# Altium PCB RarePanel.PcbDoc
Units mm, origin at the board's own origin, x right, y up, seen from the top; angles counter-clockwise.
Board outline 35 x 35.01 mm, 2 copper layers (Top Layer, Bottom Layer); 42 components, 34 nets, 133 pads, 55 vias.
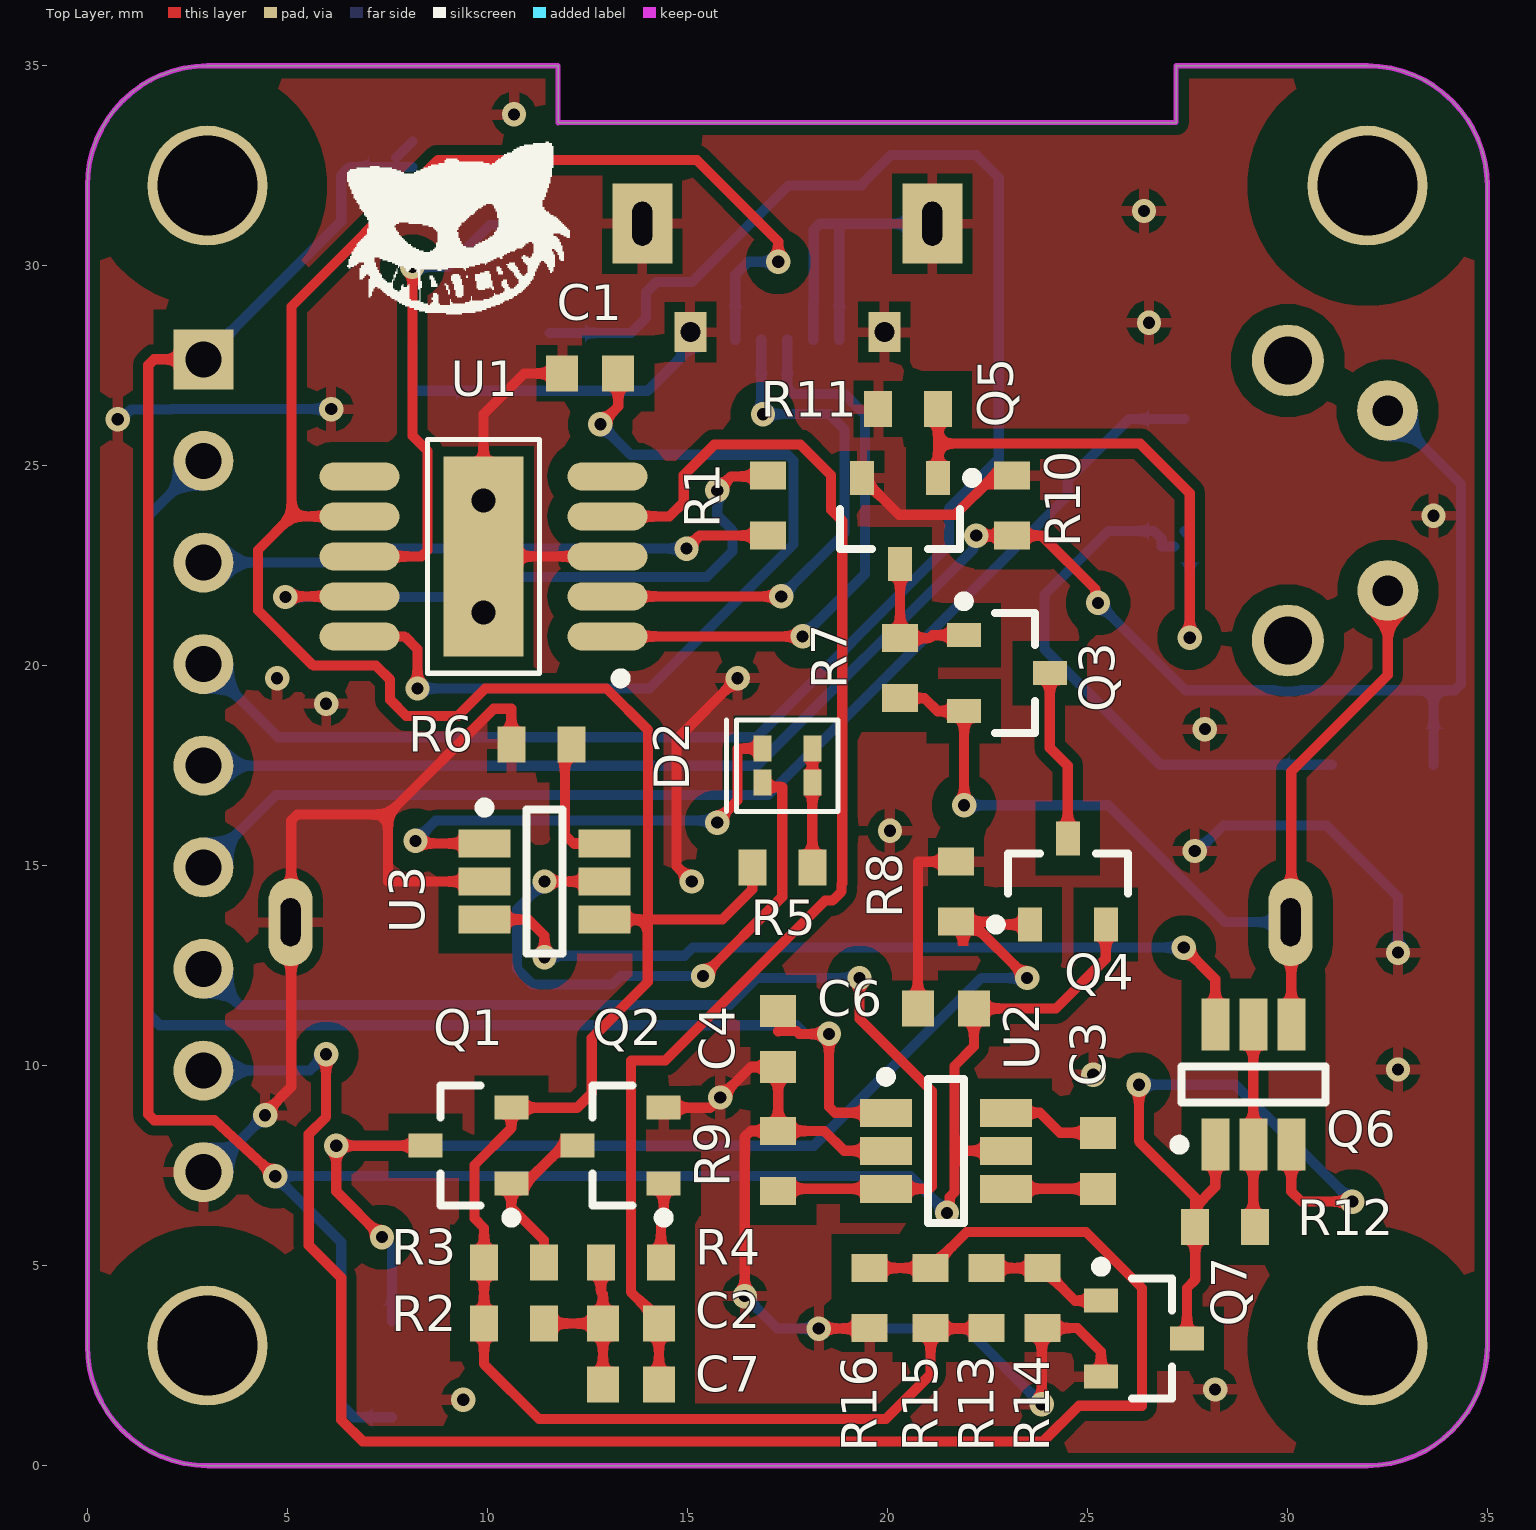
[diagram p0: Top Layer view]
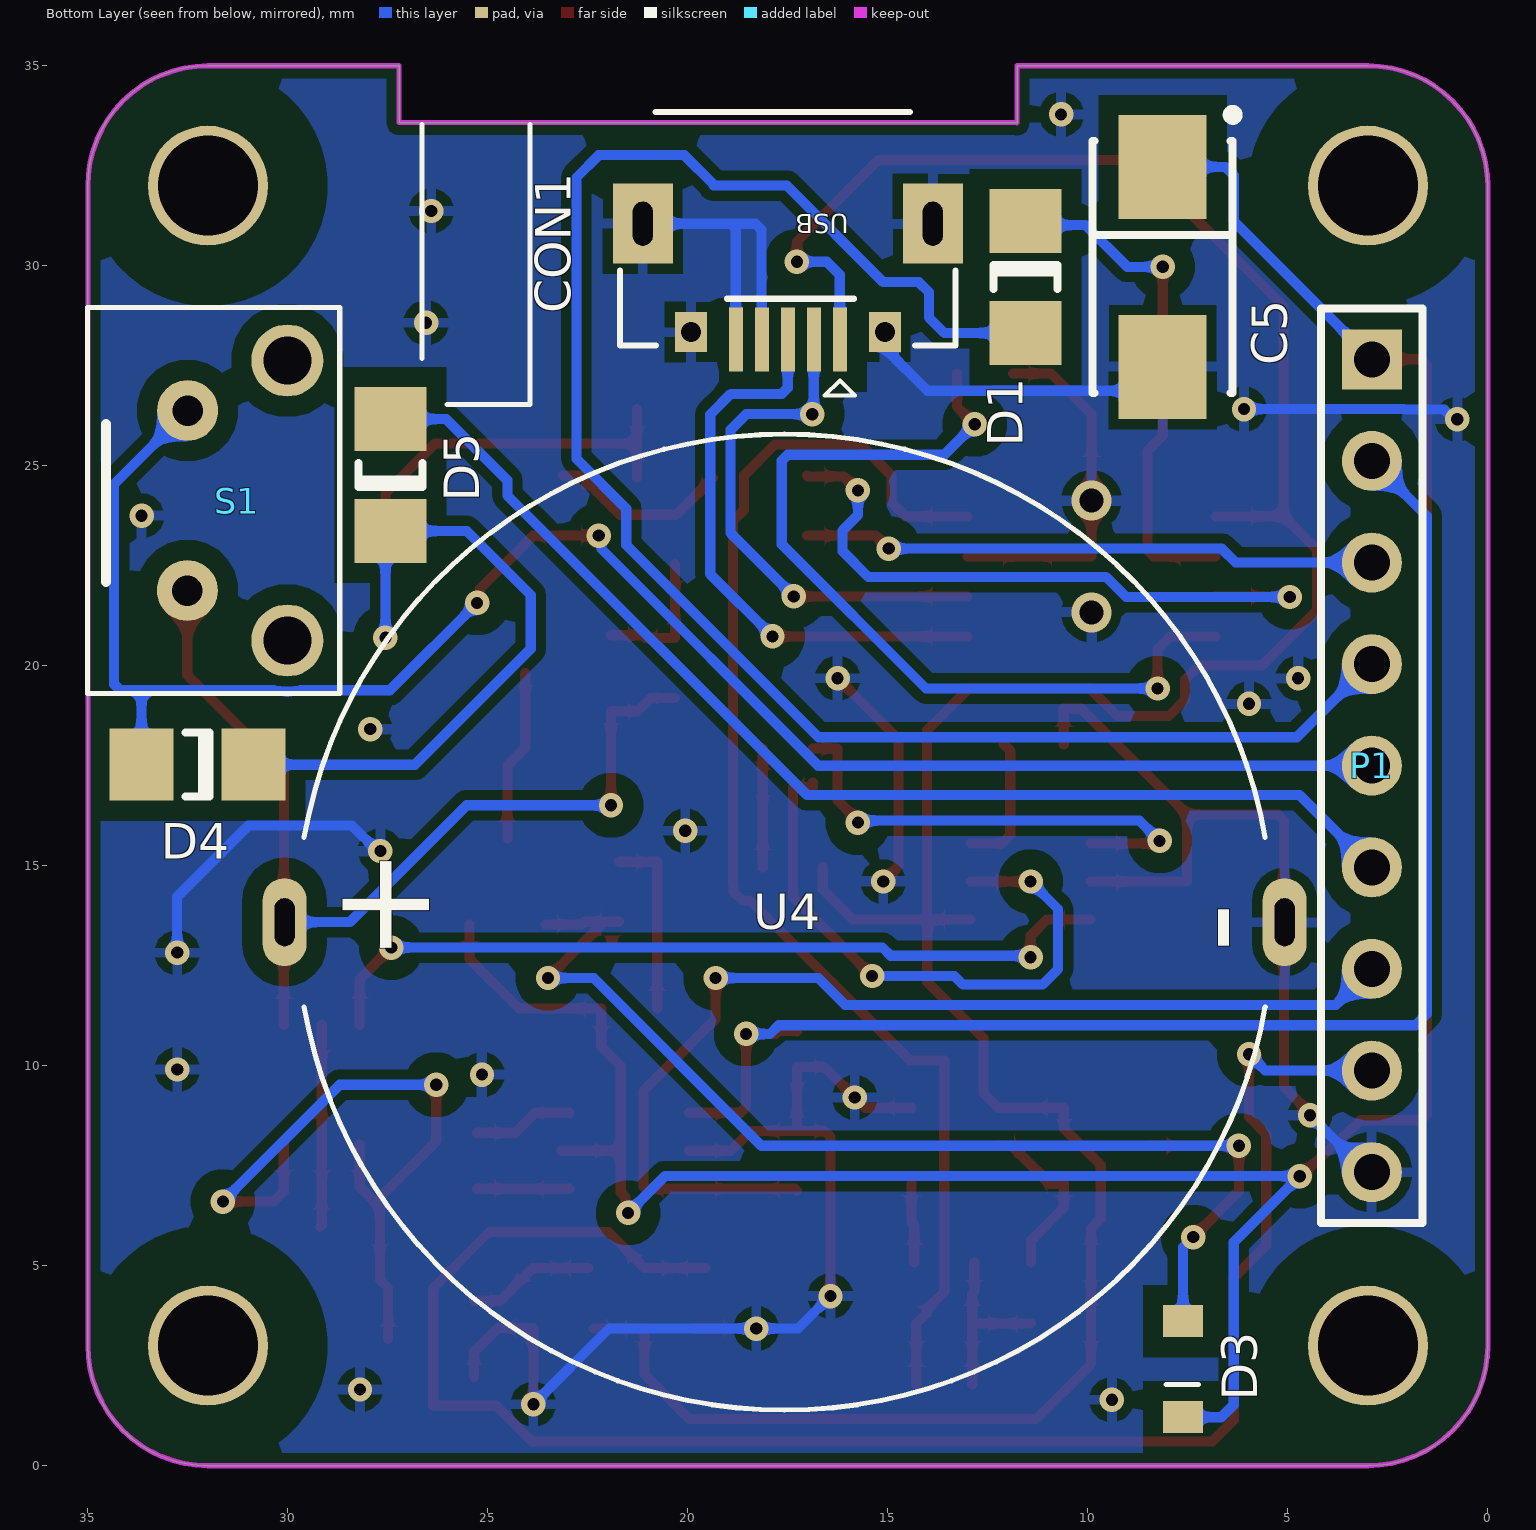
[diagram p1: Bottom Layer view, seen from below]

## Layer stack, top to bottom
Top Solder: solder mask 0.0102, Solder Resist, Dk 3.5
Top Layer: signal copper 0.0356
Dielectric 1: dielectric 0.32, FR-4, Dk 4.8
Bottom Layer: signal copper 0.0356
Bottom Solder: solder mask 0.0102, Solder Resist, Dk 3.5

## Board outline
0,3 0,32 cw(c3,32) 3,35 11.77,35 11.77,33.58 27.22,33.58 27.22,35.01 27.23,35 32,35 cw(c32,32) 35,32 35,3 cw(c32,3) 32,0 3,0 cw(c3,3)

## Design rules (kind name [scope] priority, off if disabled: settings)
Clearance Clearance_Pad [IsPad vs IsPad] p1: gap=0.127 ignorepadtopadclearanceinfootprint=FALSE
Clearance [All] p2: gap=0.254 ignorepadtopadclearanceinfootprint=TRUE except(0.508: SMDPad-Poly THPad-Poly Via-Poly)
ComponentClearance ComponentClearance_1 [InComponent('U4')] p1: gap=0.254 collisioncheckmode=3 verticalgap=0.254 showdistances=FALSE donotcheckwithout3dbody=TRUE
ComponentClearance [All] p2: gap=0.127 collisioncheckmode=3 verticalgap=0.254 showdistances=FALSE
MinimumSolderMaskSliver MinimumSolderMaskSliver_4 [HasFootprint('RED_GREEN_LED0603') vs HasFootprint('RED_GREEN_LED0603')] p1: minsoldermaskwidth=0.1
MinimumSolderMaskSliver MinimumSolderMaskSliver_3 [HasFootprint('SOT95P330-6M') vs HasFootprint('SOT95P330-6M')] p2: minsoldermaskwidth=0.04
MinimumSolderMaskSliver MinimumSolderMaskSliver_2 [HasFootprint('ESOP100-10') vs HasFootprint('ESOP100-10')] p3: minsoldermaskwidth=0.09
MinimumSolderMaskSliver MinimumSolderMaskSliver_1 [HasFootprint('USB-micro_B') vs HasFootprint('USB-micro_B')] p4: minsoldermaskwidth=0.09
MinimumSolderMaskSliver [All] p5: minsoldermaskwidth=0.254
PolygonConnect [All] p1: connectstyle=Relief reliefconductorwidth=0.254 reliefentries=4 polygonreliefangle="90 Angle" airgapwidth=0.254
RoutingVias [All] p1: holewidth=0.305 width=0.61 viastyle="Through Hole" minholewidth=0.305 minwidth=0.61 maxholewidth=0.6 maxwidth=1
SMDEntry SMDEntry_Chip [HasFootprint('ESOP100-10') or HasFootprint('SOT95P330-6M')  or HasFootprint('USB-micro_B')] p1: side=FALSE corner=FALSE anyangle=FALSE
SMDToCorner [All] p1: distance=50000
SilkToSolderMaskClearance SilkToSolderMaskClearance_2 [HasFootprint('CD3216-1206') vs HasFootprint('CD3216-1206')] p1: minsilkscreentomaskgap=0.04 clearancetoexposedcopper=TRUE
SilkToSolderMaskClearance SilkToSolderMaskClearance_1 [HasFootprint('USB-micro_B') vs HasFootprint('USB-micro_B')] p2: minsilkscreentomaskgap=0.09 clearancetoexposedcopper=TRUE
SilkToSolderMaskClearance [IsPad] p3: minsilkscreentomaskgap=0.254 clearancetoexposedcopper=TRUE
SolderMaskExpansion [All] p1: expansion=0.102 istentingtop=FALSE
SupplyNets "Schematic Supply Nets" [InNet('+5')] p1: voltage=0.000
SupplyNets "Schematic Supply Nets_1" [InNet('GND')] p2: voltage=0.000
Width [All] p1: maxlimit=0.254 minlimit=0.254 preferedwidth=0.254
27 further rules are at their usual default settings.

## Components (designator, comment, footprint, x,y, rotation, side; value= is the part's Value field where it differs from the comment)
C1 "" CAPC1608L 12.573,27.305 r0 top value=104
C2 "" CAPC1608L 13.589,3.556 r0 top value=106
C3 "" CAPC1608L 25.273,7.624 r270 top value=225
C4 "" CAPC1608L 17.272,10.668 r270 top value=225
C5 "16V" TC6032-2412 8.128,29.972 r270 bottom value=100uF
C6 "" CAPC1608L 21.463,11.43 r180 top value=225
C7 "" CAPC1608L 13.589,2.032 r0 top value=106
CON1 "USB-Micro" USB-micro_B 17.5,31.05 r0 bottom
D1 "1N4148" CD3216-1206 11.557,29.718 r90 bottom
D2 "RED_GREEN_LED" RED_GREEN_LED0603 17.5,17.5 r0 top
D3 "1N4007,T7" CD1608-0603-T7 7.62,2.413 r270 bottom
D4 "1N4148" CD3216-1206 32.258,17.526 r180 bottom
D5 "1N4148" CD3216-1206 27.432,24.765 r270 bottom
P1 "Header 9" HDR1X9 2.9,27.66 r270 bottom locked
Q1 "AO3401,A19T" SOT-23B_L 9.525,8.001 r180 top
Q2 "S8050,J3Y" SOT-23B_L 13.335,8.001 r180 top
Q3 "AO3401,A19T" SOT-23B_L 22.987,19.812 r0 top
Q4 "AO3401,A19T" SOT-23B_L 24.511,14.605 r90 top
Q5 "AO3400,A09T" SOT-23B_L 20.32,23.622 r270 top
Q6 "AO6801" SOT95P330-6M 29.15,9.525 r90 top
Q7 "S8050,J3Y" SOT-23B_L 26.416,3.175 r0 top
R1 "" RESC1608L 17.018,24.003 r270 top value=300R
R2 "" RESC1608L 10.668,3.556 r0 top value=20K
R3 "" RESC1608L 10.668,5.08 r180 top value=10K
R4 "" RESC1608L 13.589,5.08 r180 top value=4.7K
R5 "" RESC1608L 17.375,14.96 r180 top value=1K
R6 "" RESC1608L 11.35,18.034 r0 top value=10K
R7 "" RESC1608L 20.32,19.939 r270 top value=3M
R8 "" RESC1608L 21.717,14.351 r270 top value=10K
R9 "" RESC1608L 17.272,7.62 r270 top value=10K
R10 "" RESC1608L 23.114,24.003 r270 top value=10K
R11 "" RESC1608L 20.52,26.416 r0 top value=3M
R12 "" RESC1608L 28.448,5.969 r180 top value=10K
R13 "" RESC1608L 22.479,4.191 r270 top value=4.7K
R14 "" RESC1608L 23.876,4.191 r270 top value=10K
R15 "" RESC1608L 21.082,4.191 r90 top value=10K
R16 "" RESC1608L 19.558,4.191 r270 top value=3M
S1 "Key" KEY 32.512,24.13 r90 bottom
U1 "CH340K" ESOP100-10 9.906,22.733 r180 top
U2 "PW5410B" SOT95P330-6M 21.463,7.874 r0 top
U3 "JL4057A" SOT95P330-6M 11.43,14.605 r0 top
U4 "CR2447" CR2447_WITH_LEAD 17.58,13.589 r90 bottom

## Footprints (in the part's own frame and the unit in brackets; to place one, negate y for a bottom-side part, rotate by r counter-clockwise, add the part's x,y. Pads: shape width x height; smd on the part's side, far side on the other; paste and mask are expansions set on the pad)
CAPC1608L [mm] "Chip Capacitor, Body 1.6x0.8mm, IPC High Density"
  rect 0.8x0.9 smd: 1(-0.7,0) 2(0.7,0)
  body extent -0.87,-0.48 0.87,0.48, height 0.85
CD1608-0603-T7 [mm] "Chip Diode; Body 1.6 x 0.8 mm (LxW typ)"
  rect 0.8x1 smd: 1(-1.2,0) 2(1.2,0)
  silkscreen extent 0.38,-0.42 0.38,0.38
CD3216-1206 [mm] "Chip Diode; Body 3.2 x 1.6 mm (LxW typ)"
  rect 1.6x1.8 smd: 1(-1.4,0) 2(1.4,0)
  silkscreen extent -0.3,-0.8 0.3,0.8
CR2447_WITH_LEAD [mm] "CR2447 Box"
  oval 2.2x1.1 hole 0.5 slot 1.2 at 0 deg: 1(0,12.5) 2(0,-12.5)
  silkscreen extent -12.2,-12.01 12.2,12.01
ESOP100-10 [mm] "10-Pin Small Outline Package 1.00 mm Pitch and Pad"
  rect 2x5 smd: 0(0,0)
  oval 2x0.7 smd: 1(-3.1,2) 2(-3.1,1) 3(-3.1,0) 4(-3.1,-1) 5(-3.1,-2) 6(3.1,-2) 7(3.1,-1) 8(3.1,0) 9(3.1,1) 10(3.1,2)
  silkscreen extent -3.55,-2.92 1.4,3.17, body extent -2.85,-3.18 2.85,3.43, height 2.2
HDR1X9 [mm] "Connector; Header; 9 Position"
  rect 1.5x1.5 hole 0.9: 1(0,0)
  round 1.5 hole 0.9: 2(2.54,0) 3(5.08,0) 4(7.62,0) 5(10.16,0) 6(12.7,0) 7(15.24,0) 8(17.78,0) 9(20.32,0)
  silkscreen extent -1.27,-1.27 21.59,1.27
KEY [mm]
  round 1.8 hole 1.2: 0(-3.5,-2.5) 0(3.5,-2.5)
  round 1.524 hole 0.762: 1(2.25,-0.007) 2(-2.25,0)
  silkscreen extent -4.83,-3.81 4.83,2.5
RED_GREEN_LED0603 [mm] "RED_GREEN_LED0603"
  rect 0.45x0.65 smd mask-2539.97: 1(-0.625,0.425) 2(-0.625,-0.425) 3(0.625,-0.425) 4(0.625,0.425)
  silkscreen extent -1.52,-1.14 1.27,1.14
RESC1608L [mm] "Chip Resistor, Body 1.6x0.8mm, IPC High Density"
  rect 0.7x0.9 smd: 1(-0.75,0) 2(0.75,0)
  body extent -0.85,-0.48 0.85,0.48, height 0.6
SOT95P330-6M [mm]
  rect 1.3x0.7 smd: 1(-1.5,0.95) 2(-1.5,0) 3(-1.5,-0.95) 4(1.5,-0.95) 5(1.5,0) 6(1.5,0.95)
  silkscreen extent -1.62,-1.8 0.45,1.97, body extent -1.2,-1.8 1.2,1.8
SOT-23B_L [mm] "SOT23, 3-Leads, Body 2.9x1.3mm, Pitch 0.95mm, Lead Span 2.4mm, IPC High Density"
  rect 0.85x0.6 smd: 1(-1.075,0.95) 2(-1.075,-0.95) 3(1.075,0)
  silkscreen extent -1.2,-1.5 0.7,1.92, body extent -0.7,-1.5 0.7,1.5, height 1.14
TC6032-2412 [mm] "Capacitor, SM Tantalum; Body 6.0 x 3.2 mm (LxW typ)"
  rect 2.6x2.2 smd: 1(-2.5,0) 2(2.5,0)
  silkscreen extent -3.92,-1.75 3.15,1.87
USB-micro_B [mm] "micro型USB ，5.7*7.8*2.5mm"
  rect 0.35x1.6 smd: 1(-1.3,2.9) 2(-0.65,2.9) 3(0,2.9) 4(0.65,2.9) 5(1.3,2.9)
  rect 1.5x2 hole 0.5 slot 1.1 at 90 deg: 5(-3.625,0) 5(3.625,0)
  rect 0.8x1 hole 0.5: 5(-2.425,2.71) 5(2.425,2.71)
  silkscreen extent -4.19,-2.79 4.19,4.3, body extent -4,-2.71 4,2.89, height 2.8

## Part data
C1 C2 C3 C4 C6 C7: library part Cap, "Capacitor", LatestRevisionDate=17-Jul-2002, LatestRevisionNote="Re-released for DXP Platform.", PackageDescription="Radial Cap, Thru-Hole; 2 Leads; 0.3 in Pin Spacing", PackageReference=RAD-0.3, Published=8-Jun-2000, Publisher="Altium Limited"
C5: library part "Cap Pol1", "Polarized Capacitor (Radial)", LatestRevisionDate=17-Jul-2002, LatestRevisionNote="Re-released for DXP Platform.", PackageDescription="Polarized Capacitor (Radial); 2 Leads", PackageReference=RB7.6-15, Published=8-Jun-2000, Publisher="Altium Limited"
D1 D3 D4 D5: library part Diode, "Default Diode", Code_JEDEC=DO-214-AB, LatestRevisionDate=17-Jul-2002, LatestRevisionNote="Re-released for DXP Platform.", PackageDescription="DO-214-AB/SMC; 2 C-Bend Leads; Body 7.9 x 5.9 mm, inc. leads (LxW)", PackageReference=SMC, PackageVersion=Sep-1996, Published=8-Jun-2000, Publisher="Altium Limited"
P1: "Header, 9-Pin", LatestRevisionDate=17-Jul-2002, LatestRevisionNote="Re-released for DXP Platform.", Publisher="Altium Limited"
Q1 Q3 Q4: library part PMOS-2, "P-Channel Power MOSFET", ComponentLink1Description="Manufacturer Link", ComponentLink1URL=http://www.irf.com/, DatasheetVersion=PD-9.390D, LatestRevisionDate=17-Jul-2002, LatestRevisionNote="Re-released for DXP Platform.", Note="Pin 4 not drawn and electrically connected to Pin 2.", PackageDescription="TO, Thru-Hole, Vertical, Heatsink Mounted; 3 In-Line Leads; Pitch 2.54 mm", PackageReference=TO-220AB, PackageVersion=Feb-1997, Published=8-Jun-2000, Publisher="Altium Limited"
Q2 Q7: library part NPN, "NPN Bipolar Transistor", Code_JEDEC=TO-226-AA, LatestRevisionDate=17-Jul-2002, LatestRevisionNote="Re-released for DXP Platform.", PackageDescription="TO, Flat Index; 3 In-Line, Axial Leads; Body Dia. 4.8mm; Leads 0.55 x 0.51 mm (max)", PackageReference=TO-226-AA, Published=8-Jun-2000, Publisher="Altium Limited"
Q5: library part NMOS-2, "N-Channel Power MOSFET", ComponentLink1Description="Manufacturer Link", ComponentLink1URL=http://www.irf.com/, DatasheetVersion=PD-9.814, LatestRevisionDate=17-Jul-2002, LatestRevisionNote="Re-released for DXP Platform.", Note="Pin 2 is electrically connected to pin 4.", PackageDescription="TO, Thru-Hole, Vertical, Heatsink Mounted; 3 In-Line Leads; Pitch 2.54 mm", PackageReference=TO-220AB, PackageVersion=Feb-1997, Published=8-Jun-2000, Publisher="Altium Limited"
R1 R2 R3 R4 R5 R6 R7 R8 R9 R10 R11 R12 R13 R14 R15 R16: library part Res1, "Resistor", LatestRevisionDate=17-Jul-2002, LatestRevisionNote="Re-released for DXP Platform.", PackageDescription="Axial Device, Thru-Hole; 2 Leads; 0.3 in Pin Spacing", PackageReference=AXIAL-0.3, Published=8-Jun-2000, Publisher="Altium Limited"
S1: library part SW-SPST, "Single-Pole, Single-Throw Switch", LatestRevisionDate=17-Jul-2002, LatestRevisionNote="Re-released for DXP Platform.", PackageDescription="Switch; 2 Leads", PackageReference=SPST-2, Published=24-Mar-1999, Publisher="Altium Limited"
U3: "JA4057A"

## Free pads (board coordinates)
  round 3 hole 2.5: 0(3,3) 0(3,32) 0(32,3) 0(32,32)

## Via types
v1: diameter 0.61, hole 0.305, Top Layer to Bottom Layer, 53 vias
v2: diameter 1, hole 0.6, Top Layer to Bottom Layer, 2 vias

## Nets (pads, with @x,y where several pads share a name; then routed paths per layer and width w, separated by ;. In a path a pad name is that pad's centre, name@x,y a point inside that pad or via, vN(x,y) a via of type N, cw(c..) or ccw(c..) an arc to the next point about the centre after c; other vN are vias at no path point)
+5: CON1.1 Q1.2 R2.1 R3.2 R5.2 R13.2 R15.1 U1.7 U3.4 | length 77.3
  Top Layer w0.254: U1.7 5.105,23.733 ; U3.4 14.012,13.655 ; R5.2 16.625,14.405 15.875,13.655 14.021,13.655 ; v1(17.272,30.099) 17.272,30.607 15.24,32.639 8.763,32.639 5.105,28.981 5.105,23.733 ; R15.1@21.082,3.429 R13.2@22.357,3.429 ; R15.1 21.082,2.286 19.964,1.168 11.29,1.168 9.918,2.54 R2.1 R3.2 9.918,5.944 9.677,6.184 9.677,7.518 10.6,8.441 Q1.2 12.244,8.951 12.609,9.315 12.609,10.69 14.012,12.093 14.012,13.655 ; 5.105,23.733 4.267,22.895 4.267,21.387 5.652,20.002 7.217,20.002 7.569,19.65 7.569,19.147 7.971,18.745 9.264,18.745 9.95,19.431 12.979,19.431 14.021,18.39 14.021,13.655 ; 14.012,13.655 14.021,13.655
  Bottom Layer w0.254: CON1.1 16.2,29.774 16.525,30.099 v1(17.272,30.099)
ADP_ON: P1.8 R15.2 R16.1 | length 44.2
  Top Layer w0.254: v1(5.969,10.287) 5.969,8.717 5.537,8.285 5.537,5.512 6.35,4.699 6.35,1.143 6.883,0.61 23.901,0.61 24.79,1.499 26.365,1.499 26.365,4.445 24.968,5.842 21.983,5.842 21.249,5.108 R15.2 R16.1
  Bottom Layer w0.254: P1.8 5.562,9.88 v1(5.969,10.287)
GND: C1.1 C4.2 C5.2 C6.2 CON1.4 CON1.5 P1.9 Q2.2 Q5.2 Q7.2 R6.1 R8.1 R9.1 R10.1 R11.1 R14.2 R16.2 U1.0 U1.3 U2.2 U3.2 U4.2 | length 102.7
  Top Layer w0.254: v1(4.445,8.763) 4.445,8.817 5.099,9.471 5.099,16.132 5.248,16.281 7.518,16.281 ; U3.2 7.518,14.605 7.518,16.281 ; R6.1 10.6,18.923 10.16,18.923 7.518,16.281 ; C1.1 10.922,27.305 9.906,26.289 v2(9.906,24.13) U1.0 U1.3 ; Q2.2 15.57,8.951 v1(15.825,9.205) 16.587,9.968 C4.2 R9.1 ; v1(15.113,14.605) 14.732,14.986 14.732,18.161 v1(16.256,19.685) ; v1(16.434,4.242) 16.434,8.221 16.583,8.37 R9.1 ; v1(18.288,3.429) R16.2@19.818,3.429 ; Q5.2 20.293,23.774 21.692,23.774 22.67,24.753 R10.1 ; U2.2 18.922,7.874 18.426,8.37 R9.1 ; C6.2 20.763,15.101 R8.1 ; v1(23.861,1.539) 23.861,3.441 R14.2 24.753,3.441 25.341,2.853 Q7.2
  Bottom Layer w0.254: v1(0.762,26.162) 0.849,26.162 1.089,26.402 2.097,26.402 2.111,26.416 v1(6.096,26.416) ; P1.9 3.022,7.34 v1(4.445,8.763) ; C5.2@8.128,28.107 C5.2 8.128,26.873 14.008,26.873 CON1.5@15.075,27.94 ; v1(16.434,4.242) 17.247,3.429 21.971,3.429 v1(23.861,1.539) ; CON1.4 18.15,29.077 18.161,29.088 18.161,30.901 18.31,31.05 18.923,31.05 ; CON1.5@18.8,28.15 18.8,30.927 18.923,31.05 ; CON1.5@21.125,31.05 18.923,31.05 ; v1(27.686,15.367) 27.759,15.367 28.394,16.002 30.988,16.002 32.766,14.224 v1(32.766,12.827)
  other v1: 9.398,1.651 28.194,1.905 25.146,9.779 32.766,9.906 20.066,15.875 27.94,18.415 5.969,19.05 4.743,19.685 33.655,23.749 26.543,28.575 26.416,31.369 10.668,33.782
  other v2: 9.906,21.336
KEY_PRESS: D4.1 P1.5 R10.2 S1.1 | length 45.3
  Top Layer w0.254: v1(22.225,23.253) R10.2 23.864,23.253 25.199,21.918 25.199,21.638 v1(25.268,21.57)
  Bottom Layer w0.254: P1.5 16.739,17.5 22.157,22.918 22.157,23.185 v1(22.225,23.253) ; v1(25.268,21.57) 27.453,19.385 29.682,19.385 29.815,19.364 ccw(c30.012,20.63) 30.209,19.364 30.342,19.385 33.658,19.385 ; S1.1 34.341,24.544 34.341,19.534 34.192,19.385 33.658,19.385 ; D4.1 33.658,19.385
NetC1_2: C1.2 U1.10 | length 22.2
  Top Layer w0.254: U1.10 7.933,20.733 8.255,20.411 v1(8.255,19.431) ; v1(12.827,26.035) 13.273,26.481 C1.2
  Bottom Layer w0.254: v1(8.255,19.431) 14.046,19.431 17.653,23.038 17.653,25.124 17.504,25.273 13.589,25.273 v1(12.827,26.035)
NetC2_1: C2.1 C7.1 R2.2 R4.2 | length 4.5
  Top Layer w0.254: R2.2 C2.1 ; R4.2 12.839,4.343 12.889,4.293 C2.1 ; C7.1 C2.1
NetC2_2: C2.2 C7.2 U1.4 | length 33
  Top Layer w0.254: U1.4 14.554,23.733 14.91,24.089 14.91,24.765 15.672,25.527 17.831,25.527 18.593,24.765 18.593,23.901 18.872,23.622 18.872,14.554 18.856,14.538 18.856,14.352 18.633,14.129 18.447,14.129 14.453,10.135 13.589,10.135 13.589,4.343 14.016,3.916 14.016,3.829 C2.2 C7.2
NetC3_1: C3.1 U2.6 | length 2.5
  Top Layer w0.254: U2.6 23.815,8.824 24.315,8.324 C3.1
NetC3_2: C3.2 U2.4 | length 2.3
  Top Layer w0.254: U2.4 C3.2
NetCON1_2: CON1.2 U1.2 | length 13.2
  Top Layer w0.254: U1.2 v1(17.349,21.733)
  Bottom Layer w0.254: CON1.2 16.85,26.33 v1(16.891,26.289) 18.542,26.289 18.931,25.9 18.931,23.314 v1(17.349,21.733)
NetCON1_3: CON1.3 U1.1 | length 14.5
  Top Layer w0.254: U1.1 v1(17.882,20.733)
  Bottom Layer w0.254: CON1.3 17.5,26.946 17.649,26.797 18.923,26.797 19.439,26.281 19.439,22.29 v1(17.882,20.733)
NetD1_2: D1.2 U1.8 | length 12.9
  Top Layer w0.254: U1.8 8.357,22.733 8.505,22.882 8.505,25.371 8.128,25.749 v1(8.128,29.972)
  Bottom Layer w0.254: v1(8.128,29.972) 9.017,29.972 10.059,31.014 11.453,31.014 D1.2
NetD2_1: D2.1 U3.1 | length 12.2
  Top Layer w0.254: v1(8.204,15.621) 8.27,15.555 U3.1 ; v1(15.748,16.078) 15.748,16.129 16.256,16.637 16.256,17.932 16.875,17.932 D2.1
  Bottom Layer w0.254: v1(8.204,15.621) 8.712,16.129 15.697,16.129 v1(15.748,16.078)
NetD2_2: D2.2 U3.5 | length 15
  Top Layer w0.254: v1(11.43,14.605) U3.5 ; v1(15.392,12.243) 17.374,14.224 17.374,16.967 16.875,16.967 D2.2
  Bottom Layer w0.254: v1(11.43,14.605) 10.744,13.919 10.744,12.416 11.133,12.027 13.12,12.027 13.335,12.243 v1(15.392,12.243)
NetD2_3: D2.3 D2.4 R5.1 | length 3
  Top Layer w0.254: R5.1 D2.3 D2.4
NetD3_1: D3.1 Q1.3 Q4.1 R8.2 | length 30.1
  Top Layer w0.254: v1(7.366,5.715) 6.223,6.858 v1(6.223,8.001) Q1.3 ; R8.2 R8.2@22.086,13.601 ; v1(23.495,12.192) R8.2@22.086,13.601 ; Q4.1 22.652,13.53 22.581,13.601 R8.2@22.086,13.601
  Bottom Layer w0.254: v1(6.223,8.001) 18.161,8.001 22.352,12.192 v1(23.495,12.192) ; v1(7.366,5.715) 7.62,5.461 D3.1
NetD4_2: D4.2 D5.2 Q5.1 R11.2 | length 28.8
  Top Layer w0.254: Q5.1 21.27,25.552 ; R11.2 21.27,25.552 ; v1(27.559,20.701) 27.559,24.316 26.323,25.552 21.27,25.552
  Bottom Layer w0.254: D5.2@27.178,22.984 26.86,22.984 26.86,23.167 26.659,23.368 25.527,23.368 23.927,21.768 23.927,20.422 26.822,17.526 D4.2 D4.2@31.112,17.526 ; D5.2 27.559,23.238 v1(27.559,20.701)
NetQ1_1: Q1.1 Q2.3 R3.1 | length 4.4
  Top Layer w0.254: R3.1 11.418,5.639 10.6,6.457 Q1.1 10.947,7.051 11.897,8.001 Q2.3
NetQ2_1: Q2.1 R4.1 | length 2
  Top Layer w0.254: R4.1 14.339,6.02 14.41,6.091 Q2.1
NetQ3_1: Q3.1 Q5.3 R7.1 | length 3.5
  Top Layer w0.254: Q5.3 R7.1 21.057,20.689 21.13,20.762 Q3.1
NetQ3_2: Q3.2 Q6.4 R7.2 S1.2 U4.1 | length 25.4
  Top Layer w0.254: R7.2 20.93,19.189 21.257,18.862 Q3.2 21.92,18.862 v1(21.92,16.51) ; U4.1@30.099,13.589 30.099,17.355 32.512,19.768 S1.2 ; Q6.4 30.1,13.463 U4.1@30.226,13.589
  Bottom Layer w0.254: v1(21.92,16.51) 25.527,16.51 28.448,13.589 U4.1
NetQ3_3: Q3.3 Q4.3 | length 4.3
  Top Layer w0.254: Q3.3 24.062,17.95 24.511,17.501 Q4.3
NetQ6_1: Q6.1 Q6.3 Q7.3 R12.2 | length 18.1
  Top Layer w0.254: v1(26.289,9.525) 26.289,8.115 27.698,6.706 27.698,6.47 ; Q7.3 27.491,4.445 27.698,4.652 27.698,6.47 ; Q6.1 28.2,6.972 27.698,6.47 ; Q6.3 30.1,6.857 30.353,6.604 v1(31.623,6.604)
  Bottom Layer w0.254: v1(26.289,9.525) 28.702,9.525 v1(31.623,6.604)
NetQ6_2: Q6.2 Q6.5 R12.1 | length 5.1
  Top Layer w0.254: Q6.5 29.15,6.017 R12.1
NetQ6_6: Q6.6 U3.3 | length 20.5
  Top Layer w0.254: U3.3 11.024,13.655 11.43,13.249 v1(11.43,12.713) ; v1(27.412,12.954) 28.2,12.166 Q6.6
  Bottom Layer w0.254: v1(11.43,12.713) 11.468,12.751 14.93,12.751 15.133,12.954 v1(27.412,12.954)
NetQ7_1: Q7.1 R13.1 R14.1 | length 3.2
  Top Layer w0.254: R13.1 R14.1 24.692,4.125 Q7.1
NetR1_1: R1.1 U1.9 | length 16.6
  Top Layer w0.254: v1@4.969,21.733 U1.9 ; v1(15.748,24.384) 16.098,24.734 16.998,24.734 R1.1
  Bottom Layer w0.254: v1(4.953,21.717) 9.041,21.717 9.541,22.217 15.486,22.217 16.129,22.86 16.129,23.383 15.748,23.764 v1(15.748,24.384)
NetR6_2: R6.2 U3.6 | length 3.4
  Top Layer w0.254: R6.2 11.938,17.872 11.938,15.77 12.153,15.555 U3.6
POWER_EN: D5.1 P1.6 | length 29.4
  Bottom Layer w0.254: P1.6 4.704,16.764 17.018,16.764 24.511,24.257 24.511,24.638 26.038,26.165 D5.1
RXD: D1.1 P1.4 | length 44.8
  Bottom Layer w0.254: P1.4@2.924,20.063 4.775,18.212 16.732,18.212 21.539,23.019 21.539,23.927 22.784,25.172 22.784,32.207 22.225,32.766 20.088,32.766 19.359,32.037 19.359,32.004 17.526,32.004 15.113,29.591 14.224,29.591 13.97,29.337 13.97,28.702 13.586,28.318 D1.1
TXD: P1.3 R1.2 | length 14.4
  Top Layer w0.254: v1(14.978,22.927) 15.304,23.253 R1.2
  Bottom Layer w0.254: P1.3 6.304,22.58 6.651,22.927 v1(14.978,22.927)
VCC: C5.1 C6.1 D3.2 P1.1 Q4.2 U2.5 | length 68.9
  Top Layer w0.254: P1.1 1.673,27.66 1.524,27.511 1.524,8.785 1.673,8.636 3.175,8.636 v1(4.699,7.239) ; v1(21.492,6.321) 21.56,6.389 21.56,6.715 21.678,6.833 21.678,7.874 ; U2.5@23.158,7.874 21.678,7.874 ; Q4.2 25.461,12.675 24.216,11.43 C6.1 22.163,10.479 21.678,9.994 21.678,7.874
  Bottom Layer w0.254: P1.1 6.35,31.11 6.35,32.258 6.564,32.472 C5.1 ; D3.2 6.661,1.213 6.35,1.524 6.35,5.588 v1(4.699,7.239) 20.574,7.239 v1(21.492,6.321) ; C5.1@7.725,32.704 C5.1@8.128,33.107
VLED: C4.1 P1.2 U2.1 | length 36.2
  Top Layer w0.254: 17.272,10.86 17.278,10.866 17.729,10.866 17.8,10.795 v1(18.542,10.795) 18.542,8.973 18.691,8.824 U2.1
  Bottom Layer w0.254: P1.2 1.524,23.744 1.524,11.297 1.81,11.011 17.729,11.011 17.945,10.795 v1(18.542,10.795)
VLED_EN: P1.7 R9.2 U2.3 | length 27
  Top Layer w0.254: R9.2 17.326,6.924 U2.3 21.05,6.924 21.111,6.985 21.111,9.369 19.304,11.176 v1(19.304,12.192)
  Bottom Layer w0.254: P1.7@2.844,12.476 3.801,11.519 16.066,11.519 16.739,12.192 v1(19.304,12.192)
pads on no net: S1.0 U1.5 U1.6

## Polygon pours and split planes (outlines as drawn)
GND on Top Layer "GND_L01_P000" (solid, remove dead copper, pour order 0): 0,0 35.052,0 35.052,35.052 0,35.052
GND on Bottom Layer "GND_L02_P001" (solid, remove dead copper, pour order 1): 0,0 35.052,0 35.052,35.052 0,35.052

## Keep-outs
Keep-Out Layer:
  lines w0.127: 11.77,33.569 11.77,35 3,35 ccw(c3,32) 0,32 0,3 ccw(c3,3) 3,0 32,0 ccw(c32,3) 35,3 35,32 ccw(c32,32) 32,35 27.23,35 ; 11.77,33.58 27.22,33.58 27.22,35.01

## Other copper
Multi-Layer:
  pour cut-out: 32,29 cw(c32,32) 29,32 cw(c32,32) 32,35 cw(c32,32) 35,32 cw(c32,32)
  pour cut-out: 29,3 ccw(c32,3) 32,0 ccw(c32,3) 35,3 ccw(c32,3) 32,6 ccw(c32,3)
  pour cut-out: 3,0 cw(c3,3) 0,3 cw(c3,3) 3,6 cw(c3,3) 6,3 cw(c3,3)
  pour cut-out: 3,29 cw(c3,32) 0,32 cw(c3,32) 3,35 cw(c3,32) 6,32 cw(c3,32)

## Silkscreen, mask and mechanical layers (free items; w line width, h text height)
Top Overlay:
  drawing of 8 lines, arcs and shapes, not listed
Bottom Overlay:
  lines w0.127: 23.95,33.528 23.95,26.528 26.02,26.528 ; 26.65,27.686 26.65,33.528
Mechanical 13:
  circle w0.127: c3,32 r1.75
Mechanical 15:
  circle w0.127: c3,32 r3
  circle w0.127: c32,32 r3
  circle w0.127: c32,3 r3
  circle w0.127: c3,3 r3
  lines w0.127: 11.77,33.569 11.77,34.948 ; 11.77,35 27.22,35 ; 11.811,33.58 27.22,33.58 27.22,34.948 ; 12.065,28 22.479,28 ; 17.5,28 17.5,33.528 ; 23.95,33.528 23.95,26.528 26.65,26.528 26.65,33.528

## Text inside footprints (layer, text, board x,y; h text height)
CON1: Bottom Overlay "USB" at 15.976,31.452 h0.81 r180
U4: Bottom Overlay "-" at 5.65,12.827 h2.52 r270; Bottom Overlay "+" at 26.47,12.573 h2.52 r270